# Altium PCB Gate Driver.PcbDoc (part 3 of 3)
Units mm, origin at the board's own origin, x right, y up, seen from the top; angles counter-clockwise.
Board outline 66.31 x 39.31 mm, 4 copper layers (L1 (Sig), L2 (-8V), L3 (POWER), L4 (Sig)), stack 0.603 mm thick; 125 components, 59 nets, 325 pads, 255 vias.
Unrouted connection lines stored in the file: 241.
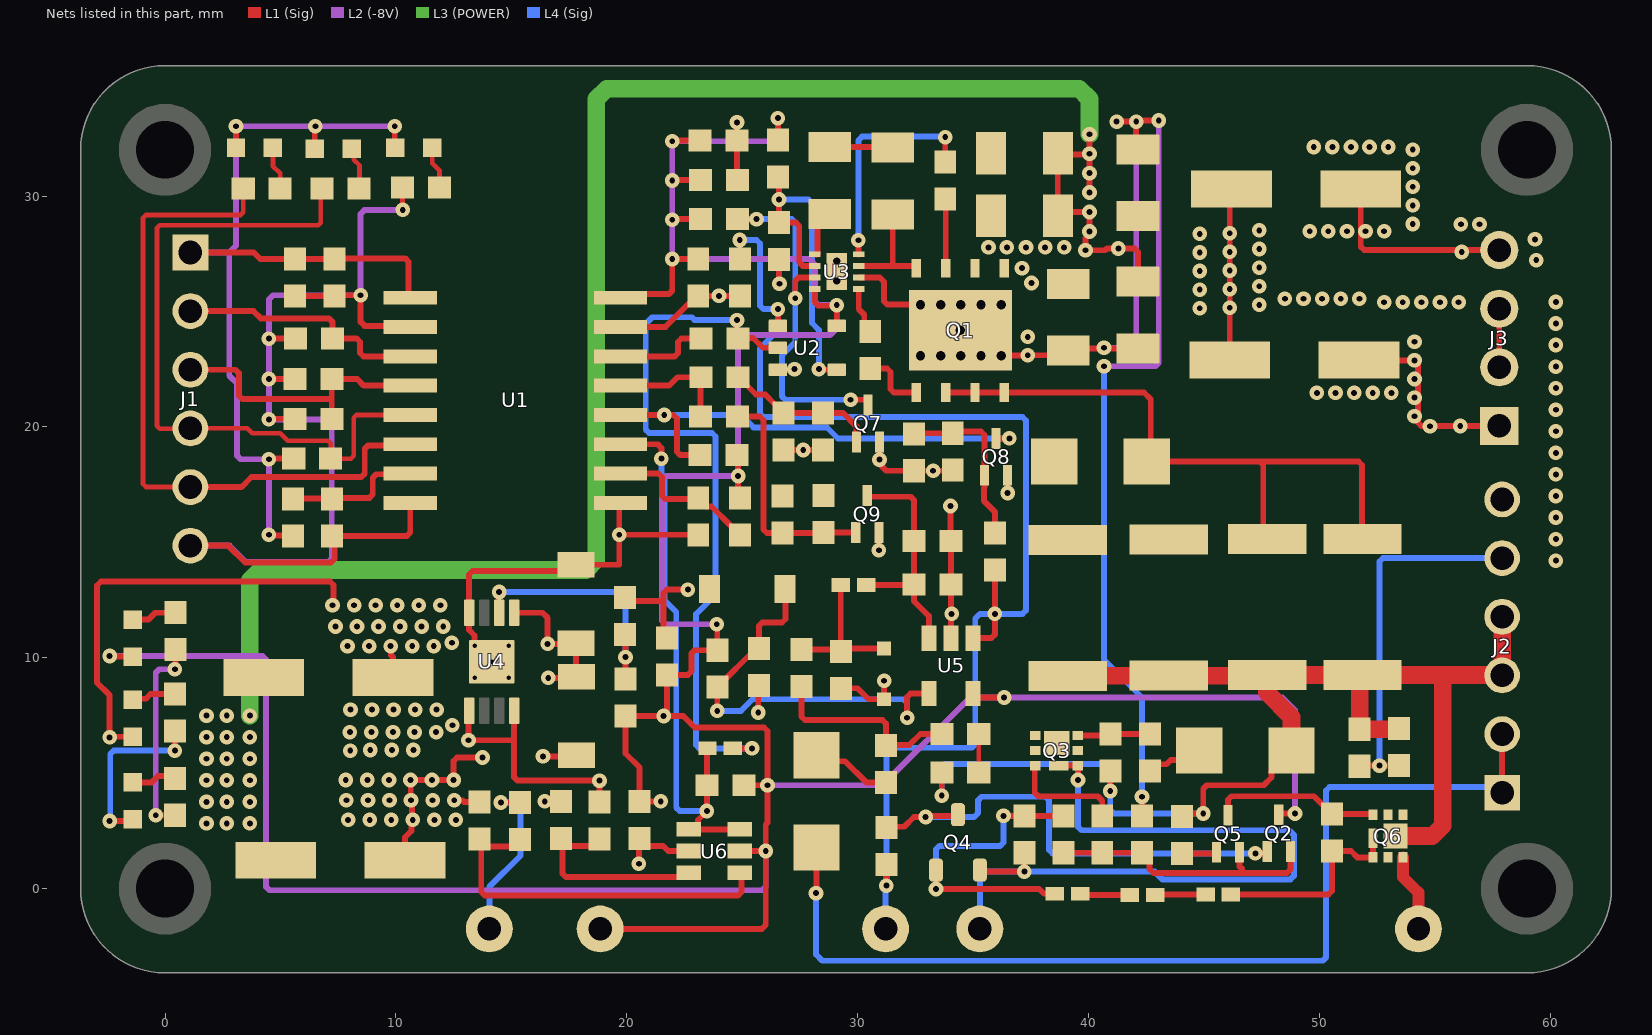
[diagram p4: the nets of this part, all layers, seen from the top]

## Via types
v1: diameter 0.635, hole 0.254, L1 (Sig) to L4 (Sig), tented both sides, 248 vias
v2: diameter 0.5, hole 0.2, L1 (Sig) to L4 (Sig), tented both sides, 5 vias
v3: diameter 0.61, hole 0.305, L1 (Sig) to L4 (Sig), 2 vias

## Nets (pads, with @x,y where several pads share a name; then routed paths per layer and width w, separated by ;. In a path a pad name is that pad's centre, name@x,y a point inside that pad or via, vN(x,y) a via of type N, cw(c..) or ccw(c..) an arc to the next point about the centre after c; other vN are vias at no path point)
0V: C2.2 C3.2 C11.2 C15.1 C16.1 C17.2 C21.1 C30.2 C31.1 D3.2 J2.5 J2.6 J3.2 J3.3 R16.1 R17.1 R40.2 TP3.1 | length 119
  L1 (Sig) w0.254: v1@-2.375,2.925 -1.5,2.925 D3.2@-1.425,3 ; v1(0.425,5.975) R17.1@0.425,6.825 ; v1(14.55,3.725) R40.2@15.375,3.725 ; v1(40.05,30.15) v1(40.05,30.992) v1@40.05,31.8 ; v1(40.05,32.675) v1(40.05,31.833) v1@40.05,31.8 ; C16.1@42.15,26.3 42.15,27.576 42.001,27.725 v1(41.3,27.725) 40.8,27.725 40.725,27.65 v1(39.875,27.65) 39.875,28.189 40.05,28.364 v1(40.05,29.308) 38.833,29.308 C3.2@38.675,29.15 C2.2@38.675,31.85 38.725,31.8 v1@40.05,31.8 ; C21.1@46.125,22.9 46.125,30.225 C17.2@46.2,30.3 ; R16.1@51.75,5.3 51.775,5.325 v1(52.613,5.325) C11.2@53.45,5.325 ; J3.2@57.8,22.58 J3.3@57.8,25.12
  L3 (POWER) w0.762: v1(3.675,7.493) 3.675,13.354 4.121,13.8 18.236,13.8 18.683,14.246 18.683,34.204 19.129,34.65 39.604,34.65 40.05,34.204 v1(40.05,32.675)
  L4 (Sig) w0.254: v1(-2.4,2.925) -2.372,2.953 -2.372,5.826 -2.223,5.975 v1(0.425,5.975) ; TP3.1@14.05,-1.75 14.05,0.075 15.4,1.425 15.4,3.576 15.251,3.725 v1(14.55,3.725) ; v1(52.613,5.325) 52.613,14.166 52.761,14.315 J2.5@57.925,14.315
  other v1: 1.8,2.823 2.675,2.823 3.675,2.823 1.8,3.757 2.675,3.757 3.675,3.757 1.8,4.691 2.675,4.691 3.675,4.691 1.8,5.625 2.675,5.625 3.675,5.625 1.8,6.559 2.675,6.559 3.675,6.559 1.8,7.493 2.675,7.493 60.25,14.205 60.25,15.139 60.25,16.073 60.25,17.007 60.25,17.941 60.25,18.875 60.25,19.809 60.25,20.743 60.25,21.677 60.25,22.611 60.25,23.545 60.25,24.479 44.825,25.138 46.125,25.162 47.4,25.288 52.813,25.4 53.619,25.4 54.425,25.4 55.231,25.4 56.038,25.4 60.25,25.412 48.513,25.55 49.319,25.55 50.125,25.55 50.931,25.55 51.737,25.55 44.825,25.944 46.125,25.969 47.4,26.094 44.825,26.75 46.125,26.775 47.4,26.9 44.825,27.556 46.125,27.581 47.4,27.706 44.825,28.362 46.125,28.387 40.05,28.467 47.4,28.512
+3V3: C4.1 C8.1 D4.2 D5.2 D6.2 J1.1 R3.2 R13.2 U1.1 | length 44.1
  L1 (Sig) w0.254: J1.1@1.1,27.555 3.845,27.555 4.125,27.275 C8.1@5.625,27.275 7.325,27.275 7.35,27.3 10.401,27.3 10.55,27.151 10.55,25.67 U1.1@10.625,25.595 ; D6.2@3.075,32.1 v1@3.075,32.875 ; v1@4.35,15.325 4.375,15.3 R13.2@5.55,15.3 ; v1@4.4,18.6 4.425,18.625 R3.2@5.575,18.625 ; D5.2@6.488,32.05 6.488,33.013 v1@6.5,33.025 ; v1@9.95,32.975 9.95,32.125 D4.2@9.975,32.1
  L2 (-8V) w0.254: J1.1@1.1,27.555 2.78,27.555 ; v1(4.5,15.325) v1(4.5,18.6) 3.274,18.6 3.125,18.749 3.125,21.875 2.78,22.22 2.78,27.555 ; v1(9.95,33.025) v1(6.512,33.025) v1(3.075,33.025) 3.075,27.85 2.78,27.555
+15V: C1.1 C2.1 C3.1 C17.1 C30.1 D2.2 J3.4 Q1.1 Q1.2 R41.2 U4.5 U4.8 | length 39.8
  L1 (Sig) w0.254: D2.2@-1.4,6.575 -2.375,6.575 v1(-2.4,6.55) -2.4,8.375 -2.946,8.921 -2.946,13.129 -2.775,13.3 7.151,13.3 7.3,13.151 7.3,12.318 v1(7.257,12.275) ; v1(9.775,10.5) 9.795,10.48 9.795,10.106 9.875,10.026 C30.1@9.875,9.15 ; U4.5@13.15,7.675 v1(13.15,6.425) 13.175,6.45 13.2,6.425 15.125,6.425 ; U4.8@15.125,7.7 15.125,6.425 ; R41.2@18.825,3.75 v1(18.825,4.675) 15.274,4.675 15.125,4.824 15.125,6.425 ; C17.1@51.8,30.3 51.8,27.809 51.949,27.66 J3.4@57.8,27.66
  other v1: 8.025,5.975 8.891,6 9.825,6 10.759,6 8.007,6.775 8.941,6.775 9.875,6.775 10.809,6.775 11.743,6.775 12.45,7.075 8.032,7.75 8.966,7.75 9.9,7.75 10.834,7.75 11.768,7.75 7.907,10.5 8.841,10.5 10.709,10.5 11.643,10.5 12.425,10.65 7.382,11.35 8.316,11.35 9.25,11.35 10.184,11.35 11.118,11.35 12.052,11.35 8.191,12.275 9.125,12.275 10.059,12.275 10.993,12.275 11.927,12.275 37.534,26.236 37.123,26.877 59.4,27.225 56.175,27.575 35.675,27.775 36.467,27.775 37.3,27.775 38.125,27.775 38.95,27.775 59.35,28.125 49.588,28.475 50.394,28.475 51.2,28.475 52.006,28.475 52.813,28.475 54.05,28.788 56.138,28.775 56.944,28.775 54.05,29.594 54.05,30.4 54.05,31.206 54.05,32.012 49.763,32.125 50.569,32.125 51.375,32.125 52.181,32.125 52.987,32.125
-3V: C5.1 C6.2 C14.1 C19.1 C20.1 C28.1 C29.1 D8.2 Q2.3 R1.2 R2.2 R14.2 R23.2 R29.2 R42.2 R48.1 TP4.1 U1.16 U2.5 U3.4 U4.1 U5.5 U6.5 | length 170
  L1 (Sig) w0.254: v1@-2.325,10.075 -2.3,10.05 D8.2@-1.4,10.05 ; U4.1@15.125,11.95 16.351,11.95 16.575,11.726 v1(16.575,10.6) 17.775,10.6 C19.1@17.8,10.625 17.8,9.2 C29.1@17.825,9.175 17.775,9.125 v1(16.6,9.125) ; TP4.1@18.85,-1.75 25.85,-1.75 26.025,-1.575 v1(26.025,1.625) ; U1.16@19.725,25.595 19.881,25.751 21.826,25.751 21.975,25.9 v1(21.975,27.275) ; v1(21.475,3.775) C28.1@20.55,3.775 20.55,5.25 19.95,5.85 R23.2@19.95,7.475 v1(21.601,7.475) ; v1@22,32.4 C14.1@23.175,32.4 ; v1@22.05,27.275 C5.1@23.1,27.275 ; v1@22.15,28.975 22.175,29 R2.2@23.2,29 ; v1@22.2,30.725 22.225,30.7 C6.2@23.2,30.7 ; v1(23.9,11.45) 23.925,11.425 R29.2@23.925,10.325 22.949,10.325 22.8,10.176 22.8,9.4 22.65,9.25 C20.1@21.75,9.25 21.75,7.624 v1(21.601,7.475) ; R42.2@24.775,18.775 24.825,18.725 v1(24.825,17.875) 24.825,17 R14.2@24.9,16.925 ; U6.5@24.892,1.625 v1(26.025,1.625) ; R48.1@25.075,4.475 v1(26.1,4.475) ; R1.2@26.55,32.425 v1(26.55,33.375) ; U3.4@28.15,25.975 28.15,25.399 28.299,25.25 29.075,25.25 v1(29.1,25.275) U2.5@29.1,24.375 ; U5.5@34.922,8.275 v1(36.35,8.275) ; Q2.3@48.25,3.2 48.3,3.25 v1(48.95,3.25) ; v1(21.601,7.475) 22.45,7.475 22.95,6.975 25.951,6.975 26.1,6.826 v1(26.1,4.475) ; v1(26.025,1.625) 26.025,2.775 26.1,2.85 v1(26.1,4.475)
  L2 (-8V) w0.254: v1(-2.4,10.075) 4.226,10.075 4.375,9.926 4.375,0.074 4.524,-0.075 25.876,-0.075 26.025,0.074 v1(26.025,1.625) ; v1(23.9,11.45) 21.674,11.45 21.525,11.599 21.525,17.675 21.725,17.875 v1(24.825,17.875) 24.825,23.55 25.25,23.975 28.801,23.975 29.1,24.274 v1(29.1,25.275) 28.3,25.275 28.15,25.425 28.15,27.025 27.9,27.275 v1(21.975,27.275) v1(21.975,28.975) v1(21.975,30.675) v1(21.975,32.375) 26.401,32.375 26.55,32.524 v1(26.55,33.375) ; v1(26.1,4.475) 31.077,4.475 34.877,8.275 v1(36.35,8.275) 48.4,8.275 48.95,7.725 v1(48.95,3.25)
-8V: C1.2 C5.2 C6.1 C7.2 C12.2 C14.2 C15.2 C16.2 C19.2 C20.2 C21.2 C22.1 C23.2 C24.2 C25.2 C26.2 C27.2 C28.2 C29.2 C31.2 D9.2 D11.2 D16.1 J3.1 Q1.9 Q3.4 Q3.7 Q4.2 Q6.4 Q6.7 Q7.2 Q8.2 Q9.2 R4.2 R18.1 R26.1 R27.1 R33.1 R37.1 R38.1 R45.1 R46.1 R47.1 R50.1 R51.1 R52.1 TP5.1 U1.9 U1.15 U2.3 U3.6 U3.9 U4.4 U4.9 U5.2 U6.2 | length 178.7
  L1 (Sig) w0.254: v1(-0.4,3.175) R18.1@0.425,3.175 ; v1(0.425,9.5) 0.45,9.525 R27.1@0.45,10.35 ; C31.2@10.4,1.225 10.4,2.225 10.675,2.5 10.675,2.916 v1(10.734,2.975) 10.696,3.013 10.696,3.788 v1(10.659,3.825) 10.646,3.838 10.646,4.688 v1(10.634,4.7) v1(11.568,4.7) v1(12.502,4.7) 12.502,5.526 12.651,5.675 v1(13.75,5.675) ; v1(12.527,3.825) 12.875,3.825 12.95,3.75 R47.1@13.625,3.75 ; v2(13.41,10.515) 13.41,10.965 13.175,11.2 U4.4@13.175,11.95 13.175,13.601 13.324,13.75 17.275,13.75 17.55,14.025 19.675,14.025 v1(19.675,15.325) ; v1(16.375,5.725) 17.775,5.725 C29.2@17.825,5.775 ; U1.9@19.725,16.705 19.675,16.655 v1(19.675,15.325) ; U1.15@19.725,24.325 21.675,24.325 23.025,25.675 C5.2@23.1,25.675 v1(24,25.675) C7.2@24.9,25.675 ; R26.1@19.925,12.6 20.074,12.451 21.6,12.451 ; v1(20.525,1.075) 20.525,1.802 20.573,1.85 21.575,1.85 21.8,1.625 U6.2@22.682,1.625 ; C20.2@21.75,10.85 21.6,11 21.6,12.451 ; v1(22.65,12.95) 21.749,12.95 21.6,12.801 21.6,12.451 ; C12.2@23.1,15.325 v1(19.675,15.325) ; v1(24.775,33.192) C14.2@24.775,32.4 24.775,30.725 C6.1@24.8,30.7 C6.1@24.8,30.845 ; v1(25.7,7.625) 25.7,8.775 C22.1@25.725,8.8 ; U2.3@26.55,22.475 27.15,22.475 27.175,22.5 v1(27.268,22.5) ; R4.2@26.6,27.25 26.6,26.22 v1(26.62,26.2) ; C25.2@26.8,19 v1(27.65,19) R50.1@28.5,19 ; R38.1@29.275,8.675 30,8.675 30.475,8.2 D11.2@31.15,8.2 v1(31.15,9) ; U3.6@30.05,26.475 30.963,26.475 31.15,26.288 31.15,25.444 31.299,25.295 Q1.9@32.725,25.295 ; v1(30.925,14.657) 30.925,14.825 Q9.2@30.925,15.425 ; Q7.2@30.95,19.35 v1(30.95,18.582) 31.023,18.51 31.023,18.322 31.245,18.1 v1(33.275,18.1) 34.1,18.1 R51.1@34.125,18.125 ; v1(34.025,16.575) 34.025,15.075 R37.1@34.05,15.05 C23.2@34.05,13.175 34.05,11.925 v1(34.075,11.9) 34.05,11.875 U5.2@34.05,10.85 ; Q4.2@35.3,0.8 35.367,0.733 v1(37.225,0.733) C24.2@37.225,1.55 ; Q1.9@36.225,23.075 36.237,23.087 37.362,23.087 v1(37.375,23.1) 38.925,23.1 39.225,23.4 C16.2@42.15,23.4 ; v1(36.5,17.132) Q8.2@36.5,17.9 ; Q3.7@38.721,5.325 Q3.4@39.548,5.325 39.548,4.703 v1(39.55,4.7) ; v1(41.225,33.225) v1(42.075,33.225) ; C15.2@42.15,32.025 42.075,32.1 v1(42.075,33.225) ; R33.1@42.325,3.15 v1(42.325,3.975) ; v1(43.05,33.275) 42.125,33.275 v1(42.075,33.225) ; D16.1@46.175,-0.25 50.401,-0.25 50.55,-0.101 R45.1@50.55,1.625 51.375,1.625 51.647,1.352 Q6.4@52.325,1.352 Q6.7@52.325,2.179 ; C21.2@51.725,22.9 51.75,22.875 54.126,22.875 54.275,22.726 54.275,20.189 54.424,20.04 J3.1@57.8,20.04
  L2 (-8V) w0.254: v1(-0.4,3.175) -0.4,9.351 -0.251,9.5 v1(0.425,9.5) ; v1(40.675,22.625) 42.901,22.625 43.05,22.774 v1(43.05,33.275) ; v1(40.675,23.425) 41.926,23.425 42.075,23.574 v1(42.075,33.225)
  L4 (Sig) w0.254: TP5.1@35.3,-1.75 35.3,0.584 35.449,0.733 v1(37.225,0.733) 42.873,0.733 43.205,0.4 48.75,0.4 48.9,0.55 48.9,2.325 48.7,2.525 39.699,2.525 39.55,2.674 v1(39.55,4.7) ; v1(40.675,22.625) 40.675,9.925 42.325,8.275 v1(42.325,3.975)
  other v1: 7.932,2.975 8.866,2.975 9.8,2.975 11.668,2.975 12.602,2.975 16.45,3.775 7.857,3.825 8.791,3.825 9.725,3.825 11.593,3.825 7.832,4.7 8.766,4.7 9.7,4.7 54.8,20.025 56.112,20.04 54.125,20.463 54.125,21.269 49.9,21.475 50.706,21.475 51.513,21.475 52.319,21.475 53.125,21.475 54.125,22.075 54.125,22.881 54.125,23.687 37.375,23.9
  other v2: 13.41,9.135 14.89,9.135 14.15,9.825 14.89,10.515
  other v3: 29.1,26.325 29.1,27.182
ABP: C23.1 D12.1 Q9.3 R37.2 U5.3 | length 10.4
  L1 (Sig) w0.254: D12.1@30.375,13.15 32.425,13.15 C23.1@32.45,13.175 ; Q9.3@30.425,17.025 30.475,16.975 32.301,16.975 32.45,16.826 R37.2@32.45,15.05 C23.1@32.45,13.175 ; U5.3@33.1,10.85 33.1,11.8 32.45,12.45 C23.1@32.45,13.175
AGND: C4.2 C8.2 C10.2 C13.2 J1.6 R11.1 R12.1 R19.1 U1.2 U1.8 | length 52.8
  L1 (Sig) w0.203: R19.1@10.287,30.375 10.287,29.538 v1@10.3,29.525
  L1 (Sig) w0.254: J1.6@1.1,14.855 2.745,14.855 3.475,14.125 7.201,14.125 7.35,14.274 7.35,15.15 C13.2@7.225,15.275 10.476,15.275 10.625,15.424 U1.8@10.625,16.705 ; v1@4.35,23.825 v1(4.5,23.825) R12.1@5.65,23.825 ; v1@4.475,20.325 4.5,20.35 C10.2@5.625,20.35 ; v1(4.5,22.075) R11.1@5.625,22.075 ; C8.2@5.625,25.675 7.325,25.675 7.35,25.7 v1(8.475,25.7) 8.475,24.549 8.649,24.375 10.575,24.375 U1.2@10.625,24.325
  L2 (-8V) w0.254: J1.6@1.1,14.855 2.795,14.855 3.5,14.15 7.076,14.15 7.225,14.299 7.225,20.05 6.95,20.325 v1(4.5,20.325) v1(4.5,22.075) v1(4.5,23.825) 4.5,25.525 4.675,25.7 v1(8.475,25.7) 8.475,29.225 8.65,29.4 v1(10.3,29.4)
BST_A: R5.2 U3.1 | length 2.1
  L1 (Sig) w0.254: U3.1@28.15,27.475 28.271,27.475 28.273,27.477 28.273,28.702 28.796,29.225 R5.2@28.8,29.225
COLLECTOR: D10.1 J2.1 J2.2 | length 44.5
  L1 (Sig) w0.254: v1(28.2,-0.2) 28.225,-0.175 D10.1@28.225,1.775 ; J2.1@57.925,4.155 J2.2@57.925,6.695
  L4 (Sig) w0.254: v1(28.2,-0.2) 28.2,-2.85 28.475,-3.125 50.151,-3.125 50.3,-2.976 50.3,4.251 50.449,4.4 57.68,4.4 J2.1@57.925,4.155
DESAT_DETECT: C7.1 R28.1 R43.2 TP2.1 U2.1 U5.1 | length 55
  L1 (Sig) w0.254: C7.1@24.9,27.275 v1(24.9,28.093) ; U2.1@26.55,24.375 v1(26.55,25.1) ; v1(31.25,0.125) R28.1@31.25,1.05 ; U5.1@35,10.85 35.801,10.85 35.95,10.999 v1(35.95,11.9) R43.2@35.95,13.8
  L4 (Sig) w0.254: v1(24.9,28.093) 25.626,28.093 25.775,27.944 25.775,25.249 25.924,25.1 v1(26.55,25.1) 26.55,24.175 25.775,23.4 25.775,20.574 25.924,20.425 37.142,20.425 37.291,20.276 37.291,12.049 37.142,11.9 v1(35.95,11.9) 35.303,11.9 35.1,11.697 35.1,6.25 34.95,6.1 31.399,6.1 31.25,5.951 v1(31.25,0.125) 31.213,0.088 TP2.1@31.213,-1.837
ENABLE: C13.1 R13.1 U1.7 | length 5.3
  L1 (Sig) w0.254: R13.1@5.55,16.9 7.2,16.9 C13.1@7.225,16.875 7.275,16.925 8.851,16.925 9,17.074 9,17.801 9.149,17.95 9.925,17.95 U1.7@9.95,17.975
FAULT: J1.4 R3.1 R20.1 U1.5 | length 31
  L1 (Sig) w0.203: R20.1@6.8,30.325 6.75,30.275 6.75,28.85 6.631,28.731 -0.231,28.731 -0.35,28.612 -0.35,20.044 -0.231,19.925 1.09,19.925 J1.4@1.1,19.935 3.565,19.935 3.775,19.725 4.988,19.725 5.313,19.4 7.056,19.4 7.175,19.281 R3.1@7.175,18.625 8.056,18.625 8.175,18.744 8.175,20.396 8.294,20.515 U1.5@10.625,20.515
FAULT_ISO: Q8.3 R42.1 U1.12 | length 21
  L1 (Sig) w0.254: U1.12@19.725,20.515 v1(21.625,20.515) 22.026,20.515 22.175,20.366 22.175,18.924 22.324,18.775 R42.1@23.175,18.775 ; Q8.3@36,19.5 v1(36.575,19.5)
  L4 (Sig) w0.254: v1(21.625,20.515) 24.96,20.515 25.5,19.975 28.675,19.975 29.15,19.5 v1(36.575,19.5)
GATE: C11.1 D7.1 J2.3 J2.4 Q6.1 Q6.2 Q6.5 Q6.6 Q6.8 R8.1 R9.1 R10.2 R15.2 R16.2 R24.2 R35.1 R39.1 TP1.1 | length 64.6
  L1 (Sig) w0.254: v1(33.65,4.025) R35.1@33.65,5.025 ; v1(40.95,4.225) R24.2@40.95,5.1 ; R39.1@44.05,3.125 44.175,3.25 v1(44.975,3.25) 44.975,4.326 45.124,4.475 47.6,4.475 47.935,4.81 47.935,5.11 D7.1@48.8,5.975
  L1 (Sig) w0.508: Q6.6@53.625,1.352 53.625,0.5 54.3,-0.175 TP1.1@54.3,-1.837
  L1 (Sig) w0.762: R8.1@39.125,9.225 R9.1@43.475,9.225 47.725,9.225 47.725,8.5 48.8,7.425 D7.1@48.8,5.975 ; R15.2@47.75,9.25 R10.2@51.875,9.25 ; Q6.8@53.3,2.275 54.904,2.275 55.35,2.721 55.35,9.2 55.3,9.25 ; C11.1@53.45,6.925 53.425,6.9 R16.2@51.75,6.9 51.75,9.125 R10.2@51.875,9.25 ; J2.4@57.925,11.775 J2.3@57.925,9.235 57.91,9.25 55.3,9.25 ; R10.2@51.875,9.25 55.3,9.25
  L4 (Sig) w0.254: v1(33.65,4.025) 33.65,5.251 33.799,5.4 40.801,5.4 40.95,5.251 40.95,4.052 40.95,3.399 41.099,3.25 v1(44.975,3.25)
NetC9_1: C9.1 R5.1 | length 2.7
  L1 (Sig) w0.254: R5.1@28.8,32.125 31.5,32.125 C9.1@31.525,32.1
NetC12_1: C12.1 R14.1 U1.10 | length 7.2
  L1 (Sig) w0.254: U1.10@19.725,17.975 21.376,17.975 21.525,17.826 21.525,17.024 21.674,16.875 C12.1@23.1,16.875 ; C12.1@23.1,16.925 23.1,16.9 23.448,16.552 23.673,16.552 24.527,15.698 24.552,15.698 24.9,15.35 R14.1@24.9,15.325 ; R14.1@24.8,15.225 24.9,15.225 R14.1@25.255,15.225
NetC22_2: C22.2 D9.1 R29.1 U5.4 | length 18.1
  L1 (Sig) w0.254: v1(23.925,7.699) R29.1@23.925,8.725 25.6,10.4 C22.2@25.725,10.4 25.725,11.376 25.874,11.525 26.726,11.525 26.875,11.674 26.875,12.962 D9.1@26.862,12.975 ; v1(32.15,7.4) 32.15,8.301 32.299,8.45 U5.4@33.1,8.45
  L4 (Sig) w0.254: v1(23.925,7.699) 24.949,7.699 25.45,8.2 32.001,8.2 32.15,8.051 v1(32.15,7.4)
NetC24_1: C24.1 D14.2 Q4.1 R31.1 | length 14.6
  L1 (Sig) w0.254: Q4.1@33.4,0.8 v1(33.4,-0.018) 37.866,-0.018 38.074,-0.225 D14.2@38.55,-0.225 ; v1(36.325,3.15) C24.1@37.225,3.15 R31.1@38.925,3.15
  L4 (Sig) w0.254: v1(33.4,-0.018) 33.4,1.701 33.549,1.85 36.176,1.85 36.325,1.999 v1(36.325,3.15)
NetC25_1: C25.1 Q7.1 R44.2 R50.2 | length 6.7
  L1 (Sig) w0.254: R44.2@24.825,22.15 24.85,22.15 25.6,21.4 26,21.4 26.427,20.973 26.452,20.973 26.8,20.625 C25.1@26.8,20.6 R50.2@28.5,20.6 29.376,20.6 29.95,20.026 Q7.1@29.95,19.35
NetC26_1: C26.1 Q8.1 R43.1 R51.2 | length 7.6
  L1 (Sig) w0.254: C26.1@32.45,19.7 32.475,19.725 R51.2@34.125,19.725 34.2,19.8 35.351,19.8 35.5,19.651 Q8.1@35.5,17.9 35.5,17.374 35.471,17.345 35.471,16.804 35.95,16.325 R43.1@35.95,15.4
NetC27_1: C27.1 Q9.1 R49.2 R52.2 | length 10
  L1 (Sig) w0.254: R49.2@24.8,20.45 25.776,20.45 25.925,20.301 25.925,15.549 26.074,15.4 R52.2@26.75,15.4 28.5,15.4 C27.1@28.525,15.425 Q9.1@29.925,15.425
NetD1_2: D1.2 R8.2 R9.2
NetD2_1: D2.1 R17.2 | length 1.9
  L1 (Sig) w0.254: D2.1@-1.35,8.225 -0.825,8.225 -0.625,8.425 R17.2@0.425,8.425
NetD3_1: D3.1 R18.2 | length 2
  L1 (Sig) w0.254: D3.1@-1.4,4.6 -0.575,4.6 -0.3,4.875 0.325,4.875 R18.2@0.425,4.775
NetD4_1: D4.1 R19.2 | length 1.9
  L1 (Sig) w0.203: D4.1@11.575,32.1 11.575,31.425 11.887,31.113 R19.2@11.887,30.375
NetD5_1: D5.1 R20.2 | length 1.9
  L1 (Sig) w0.203: D5.1@8.088,32.05 8.175,31.963 8.175,31.574 8.425,31.324 8.425,30.35 R20.2@8.4,30.325
NetD6_1: D6.1 R21.2 | length 1.9
  L1 (Sig) w0.203: D6.1@4.675,32.1 4.675,31.3 4.987,30.988 R21.2@4.987,30.325
NetD7_2: D7.2 R25.2 | length 2.5
  L1 (Sig) w0.254: R25.2@42.675,5.1 42.957,5.382 43.382,5.382 43.568,5.568 44.393,5.568 D7.2@44.8,5.975
NetD8_1: D8.1 R27.2 | length 2
  L1 (Sig) w0.254: D8.1@-1.4,11.65 -0.725,11.65 -0.425,11.95 R27.2@0.45,11.95
NetD10_2: D10.2 R32.1 | length 3.5
  L1 (Sig) w0.254: D10.2@28.225,5.775 28.482,5.518 29.457,5.518 30.375,4.6 R32.1@31.225,4.6
NetD11_1: D11.1 D12.2 R34.2 R38.2 | length 6.5
  L1 (Sig) w0.254: R34.2@27.575,10.35 29.2,10.35 R38.2@29.275,10.275 ; D12.2@29.275,13.15 R38.2@29.275,10.275 ; D11.1@31.15,10.4 29.4,10.4 R38.2@29.275,10.275
NetD14_1: D14.1 D15.2 | length 2.2
  L1 (Sig) w0.254: D14.1@39.65,-0.225 39.7,-0.275 D15.2@41.8,-0.275
NetD15_1: D15.1 D16.2 | length 2.2
  L1 (Sig) w0.254: D15.1@42.9,-0.275 42.925,-0.25 D16.2@45.075,-0.25
NetQ1_3: Q1.3 R7.2 | length 3
  L1 (Sig) w0.254: R7.2@33.8,29.875 33.819,29.856 Q1.3@33.819,26.877
NetQ1_5: Q1.5 R22.2 | length 2.9
  L1 (Sig) w0.254: R22.2@30.55,22.525 31.276,22.525 31.425,22.376 31.425,21.641 31.574,21.492 Q1.5@32.549,21.492
NetQ2_1: Q2.1 Q4.3 R28.2 | length 21
  L1 (Sig) w0.254: R28.2@31.25,2.675 32.025,2.675 32.45,3.1 v1(32.95,3.1) ; v1@33,3.15 Q4.3@34.338,3.15 ; v1(47.233,1.525) 47.675,1.525 Q2.1@47.75,1.6
  L4 (Sig) w0.254: v1(32.95,3.1) 35.051,3.1 35.225,3.274 35.225,3.826 35.374,3.975 38.151,3.975 38.3,3.826 38.3,1.674 38.449,1.525 v1(47.233,1.525)
NetQ2_2: Q2.2 Q5.2 R30.1 R31.2 R33.2 | length 12.2
  L1 (Sig) w0.254: R31.2@38.925,1.55 R30.1@40.6,1.55 R33.2@42.325,1.55 42.64,1.235 42.64,0.86 42.825,0.675 46.649,0.675 ; Q5.2@46.55,1.575 46.55,0.961 46.649,0.862 46.649,0.675 ; Q2.2@48.75,1.6 48.75,0.824 48.601,0.675 46.649,0.675
NetQ3_1: Q3.1 Q3.2 Q3.5 Q3.6 Q3.8 R24.1 R25.1 | length 3.2
  L1 (Sig) w0.254: Q3.6@39.548,6.625 40.875,6.625 R24.1@40.95,6.7 R25.1@42.675,6.7
NetQ3_3: Q3.3 R30.2 | length 4.9
  L1 (Sig) w0.254: Q3.3@37.703,5.325 37.675,5.297 37.675,4.148 37.824,3.999 40.404,3.999 40.6,3.803 R30.2@40.6,3.15
NetQ5_1: Q5.1 R39.2 | length 1.5
  L1 (Sig) w0.254: R39.2@44.05,1.525 45.5,1.525 Q5.1@45.55,1.575
NetQ5_3: Q5.3 Q6.3 R45.2 | length 7.4
  L1 (Sig) w0.254: Q5.3@46.05,3.175 46.05,3.847 46.203,4 49.775,4 50.177,3.598 50.202,3.598 50.55,3.25 R45.2@50.55,3.225 52.298,3.225 Q6.3@52.325,3.197
NetR7_1: R7.1 U3.8 | length 9.8
  L1 (Sig) w0.254: v1(30.038,28.088) 30.038,27.477 30.04,27.475 U3.8@30.05,27.475 ; R7.1@33.8,31.475 v1(33.8,32.55)
  L4 (Sig) w0.254: v1(30.038,28.088) 30.038,32.412 30.2,32.575 v1@33.75,32.575
NetR22_1: R22.1 U3.5 | length 2.1
  L1 (Sig) w0.254: U3.5@30.05,25.975 30.05,25.1 30.293,24.857 30.293,24.382 R22.1@30.55,24.125
NetR23_1: R23.1 R26.2 U4.2 | length 11
  L1 (Sig) w0.254: U4.2@14.475,11.95 v1(14.475,12.85) ; R26.2@19.925,11 19.95,10.975 v1(19.95,10.025) R23.1@19.95,9.075
  L4 (Sig) w0.254: v1(14.475,12.85) 19.776,12.85 19.95,12.676 v1(19.95,10.025)
NetR32_2: R32.2 R34.1 R36.2 | length 8.6
  L1 (Sig) w0.254: R34.1@27.575,8.75 27.575,7.449 27.724,7.3 31.076,7.3 31.225,7.151 R32.2@31.225,6.225 ; R32.2@31.225,6.2 R32.2@31.225,6.225 ; R36.2@33.65,6.7 32.725,6.7 32.25,6.225 R32.2@31.225,6.225
NetR35_2: R35.2 R36.1 | length 1.7
  L1 (Sig) w0.203: R35.2@35.25,5.025 R36.1@35.25,6.7
NetR40_1: R40.1 R47.2 U6.4 | length 16
  L1 (Sig) w0.254: R40.1@15.45,1.8 15.425,1.825 13.7,1.825 13.7,-0.151 13.849,-0.3 24.826,-0.3 24.975,-0.151 24.975,0.602 U6.4@24.892,0.685
NetR41_1: R41.1 R46.2 U6.3 | length 8.5
  L1 (Sig) w0.254: R41.1@18.9,1.825 18.875,1.85 17.225,1.85 17.225,0.643 17.374,0.495 22.491,0.495 U6.3@22.682,0.685
PWM: J1.2 R12.2 U1.3 | length 11
  L1 (Sig) w0.254: J1.2@1.1,25.015 3.835,25.015 4.15,24.7 7.101,24.7 7.25,24.551 R12.2@7.25,23.825 8.301,23.825 8.45,23.676 8.45,23.204 8.599,23.055 U1.3@10.625,23.055
PWM_A: R6.2 U1.14 | length 4.1
  L1 (Sig) w0.254: U1.14@19.725,23.055 22.076,23.055 22.225,23.204 22.225,23.678 22.374,23.827 R6.2@23.225,23.827
PWM_BUFF: R1.1 R4.1 U2.4 U3.2 | length 14.7
  L1 (Sig) w0.254: R1.1@26.55,30.825 26.6,30.775 v1(26.6,29.85) R4.1@26.6,28.85 27.326,28.85 27.475,28.701 27.475,27.126 27.624,26.977 U3.2@28.027,26.977 ; v1(28.325,22.5) 28.35,22.475 U2.4@29.1,22.475
  L4 (Sig) w0.254: v1(26.6,29.85) 27.876,29.85 28.025,29.701 28.025,24.5 28.325,24.2 v1(28.325,22.5)
PWM_ISO: D13.2 R6.1 U2.2 | length 31.6
  L1 (Sig) w0.254: D13.2@24.6,6.075 v1(25.425,6.075) ; v1(24.775,24.625) 24.775,23.877 R6.1@24.825,23.827 24.848,23.85 25.475,23.85 25.9,23.425 U2.2@26.55,23.425
  L4 (Sig) w0.254: v1(24.775,24.625) 22.951,24.625 22.826,24.75 21.105,24.75 20.825,24.47 20.825,19.879 20.974,19.73 23.696,19.73 23.845,19.582 23.845,12.732 23,11.887 23,6.224 23.149,6.075 v1(25.425,6.075)
RESET: C10.1 J1.3 R11.2 U1.4 | length 12.5
  L1 (Sig) w0.254: J1.3@1.1,22.475 3.051,22.475 3.2,22.326 3.2,21.361 3.349,21.213 7.225,21.213 ; C10.1@7.225,20.35 7.225,21.213 ; U1.4@10.625,21.785 8.615,21.785 8.325,22.075 R11.2@7.225,22.075 7.225,21.213
RESET_ISO: R44.1 R49.1 U1.13 | length 5.4
  L1 (Sig) w0.254: U1.13@19.725,21.785 21.835,21.785 22.2,22.15 R44.1@23.225,22.15 23.2,22.125 R49.1@23.2,20.45
SKIP: Q7.3 R2.1 U3.3 | length 15.8
  L1 (Sig) w0.254: R2.1@24.8,29 v1(25.625,29) ; v1(27.3,25.575) 27.3,26.324 27.449,26.473 U3.3@28.027,26.473 ; v1(29.7,21.175) 30.377,21.175 30.45,21.102 Q7.3@30.45,20.95
  L4 (Sig) w0.254: v1(25.625,29) 27.151,29 27.3,28.851 v1(27.3,25.575) 27.3,23.675 26.721,23.096 26.721,21.333 26.879,21.175 v1(29.7,21.175)
SW_A: D1.1 Q1.6 Q1.7 Q1.8 R10.1 R15.1 | length 27.6
  L1 (Sig) w0.254: Q1.6@33.819,21.492 Q1.7@35.089,21.492 Q1.8@36.359,21.492 42.408,21.492 42.7,21.2 42.7,18.675 D1.1@42.525,18.5 47.426,18.5 ; R15.1@47.675,15.275 47.575,15.375 47.575,18.351 47.426,18.5 ; R10.1@51.8,15.275 51.85,15.325 51.85,18.351 51.701,18.5 47.426,18.5
SW_NODE: C9.2 Q1.4 U3.7 | length 4.7
  L1 (Sig) w0.254: U3.7@30.173,26.973 31.374,26.973 31.376,26.975 31.525,26.975 ; C9.2@31.525,29.2 31.525,26.975 ; Q1.4@32.549,26.877 32.549,26.897 32.471,26.975 31.525,26.975
UVLO: J1.5 R21.1 U1.6 | length 30
  L1 (Sig) w0.203: J1.5@1.1,17.395 -0.82,17.395 -0.95,17.525 -0.95,29.056 -0.831,29.175 3.268,29.175 3.387,29.294 R21.1@3.387,30.325
  L1 (Sig) w0.254: J1.5@1.1,17.395 3.32,17.395 3.75,17.825 8.5,17.825 8.65,17.975 8.65,19.051 8.799,19.2 10.58,19.2 U1.6@10.625,19.245
UVLO_ISO: D13.1 R48.2 U1.11 U6.1 U6.6 | length 25.3
  L1 (Sig) w0.254: U1.11@19.725,19.245 21.343,19.245 21.5,19.088 v1(21.5,18.625) ; D13.1@23.5,6.075 23.475,6.05 R48.2@23.475,4.475 v1(23.475,3.358) 23.088,2.971 23.088,2.755 22.898,2.565 U6.1@22.682,2.565 U6.6@24.892,2.565
  L4 (Sig) w0.254: v1(21.5,18.625) 21.5,17.924 21.649,17.775 21.649,12.476 22.147,11.978 22.147,3.507 22.296,3.358 v1(23.475,3.358)
pads on no net: MH1.1 MH2.1 MH3.1 MH4.1 U4.3 U4.6 U4.7

## Polygon pours and split planes (outlines as drawn)
+15V on L1 (Sig) "+15V_L01_P045" (solid, remove dead copper, pour order 45): 17.075,13.913 17.6,13.388 17.6,5.225 17.7,5.125 19.45,5.125 19.45,2.75 5.975,2.75 5.975,13.913
AGND on L1 (Sig) "AGND_L01_P040" (solid, remove dead copper, pour order 40): -3.425,13.75 13.324,13.75 13.65,14.076 13.65,35.4 -0.885,35.4 ccw(c-0.885,32.86) -3.425,32.86
AGND on L1 (Sig) "AGND_L01_P038" (solid, remove dead copper, pour order 38): -3.313,13.862 -3.35,13.9 -3.35,32.835 cw(c-0.81,32.835) -0.81,35.375 12.725,35.375 12.95,35.15 12.95,14
-8V on L1 (Sig) "-8V_L01_P037" (solid, remove dead copper, pour order 37): -3.475,13.7 -3.15,14.025 17.8,14.025 17.8,35.275 17.9,35.6 59.985,35.6 cw(c59.985,33.06) 62.525,33.06 62.525,32.375 62.6,32.3 62.6,-1.01 cw(c60.06,-1.01) 60.06,-3.55 -1.085,-3.55 cw(c-1.085,-1.01) -3.625,-1.01 -3.625,-0.075 ccw(c-3.625,0.075) -3.475,0.075
0V on L1 (Sig) "0V_L01_P034" (solid, remove dead copper, pour order 34): 16.025,-0.425 16.075,-0.45 16.075,-3.484 2.912,-3.484 cw(c2.912,-2.775) 2.204,-2.772 2.217,0.042 ccw(c-0.315,-0.152) -0.06,2.375 -2.75,2.375 -2.75,10.681 6.6,10.725 6.6,5.825 7.1,5.325 7.1,-0.1 7.425,-0.425
SW_NODE on L1 (Sig) "SW_NODE_L01_P007" (solid, remove dead copper, pour order 7): 29.625,27.25 30.375,27.25 30.375,29.9 30.425,29.95 33,29.95 33.125,29.825 33.125,26.35 31.9,26.35 31.575,26.675 29.622,26.675
-8V on L1 (Sig) "-8V_L01_P005" (solid, remove dead copper, pour order 5): 18.1,24.925 18.1,23.758 27.4,23.758 27.4,27.875 27.35,27.925 25.75,27.925 25.75,26.55 25.45,26.25 22.9,26.25 21.575,24.925
+15V on L1 (Sig) "+15V_L01_P000" (solid, remove dead copper, pour order 0): 34.425,34.325 37.275,34.325 37.275,28.2 40.2,28.2 40.2,25.45 34.425,25.45
GATE on L1 (Sig) "GATE_L01_P016" (solid, remove dead copper, pour order 16): 46.4,7.925 46.8,7.525 46.8,4.475 50.275,4.475 50.275,6.1 54.275,6.1 54.375,6 54.375,4.275 54.175,4.075 52.75,4.075 52.75,0.925 56.175,0.925 56.175,7.45 56.625,7.925 61.05,7.925 61.05,12.9 53.775,12.9 53.775,11.275 37.15,11.275 37.15,7.925
NetQ3_1 on L1 (Sig) "NETQ3_1_L01_P017" (solid, remove dead copper, pour order 17): 37.225,5.675 37.25,5.7 40.125,5.7 40.125,6.075 43.25,6.075 43.325,6.15 43.325,7.55 37.225,7.55
-8V on L1 (Sig) "-8V_L01_P002" (solid, remove dead copper, pour order 2): 31.425,22.775 31.6,22.6 43.525,22.6 43.525,24.35 36.75,24.35 36.75,26.125 31.375,26.125 31.375,26.675 29.597,26.675 29.597,27.6 28.65,27.6 28.6,27.55 28.609,25.7 29.543,25.7 29.597,25.647 29.597,26.303 30.503,26.303 30.475,26.275 30.475,24.954 31.196,24.954 31.425,24.725
+15V on L1 (Sig) "+15V_L01_P015" (solid, remove dead copper, pour order 15): 49.275,26.975 49.275,33.6 49.6,33.925 55.225,33.925 55.575,33.575 55.575,29.425 55.875,29.125 61.6,29.125 61.6,26.725 49.468,26.725
SW_A on L1 (Sig) "SW_A_L01_P012" (solid, remove dead copper, pour order 12): 43.687,22.575 46.037,20.225 52.925,20.225 52.925,20.2 53.7,19.425 53.7,14.125 45.55,14.125 45.55,16.7 40.975,16.7 40.625,17.05 40.625,20.225 33.425,20.225 33.425,22.575
-8V on L1 (Sig) "-8V_L01_P014" (solid, remove dead copper, pour order 14): 49.25,24.921 55.325,24.921 55.325,21.225 59.425,21.225 59.625,21.025 59.625,18.425 59.575,18.475 53.241,18.475 53.241,20.775 49.25,20.775
NetD1_2 on L1 (Sig) "NETD1_2_L01_P013" (solid, remove dead copper, pour order 13): 45.325,14.1 45.325,16.55 45.2,16.675 40.225,16.675 40.1,16.8 40.1,20.05 39.925,20.225 37.025,20.225 37.025,14.125 37.05,14.1
-8V on L1 (Sig) "-8V_L01_P011" (solid, remove dead copper, pour order 11): 26.15,16.4 26.2,16.45 26.2,19.6 29.1,19.6 29.125,19.575 29.125,16.425
-3V on L1 (Sig) "-3V_L01_P004" (solid, remove dead copper, pour order 4): 21.325,25.2 21.825,25.7 22.4,26.275 23.825,26.275 23.875,26.325 23.875,33.125 21.325,33.125 21.325,26.55 20.925,26.15 18.05,26.15 18.05,25.2
NetC9_1 on L1 (Sig) "NETC9_1_L01_P008" (solid, remove dead copper, pour order 8): 27.6,31.3 27.6,33.125 32.875,33.125 32.875,31.3
BST_A on L1 (Sig) "BST_A_L01_P006" (solid, remove dead copper, pour order 6): 27.75,27.275 27.75,30.05 30,30.05 30.025,30.025 30.025,28.1 28.6,28.1 28.6,27.275
-8V on L1 (Sig) "-8V_L01_P003" (solid, remove dead copper, pour order 3): 40.475,31.113 40.475,33.537 43.625,33.537 43.625,31.113
0V on L1 (Sig) "0V_L01_P001" (solid, remove dead copper, pour order 1): 61.725,26.05 61.725,13.4 61.5,13.175 55.325,13.175 55.325,18 55.6,18.275 58.8,18.275 59.2,18.675 59.2,21.525 55.7,21.525 55.7,23.9 55.2,24.4 48,24.4 48,21.925 44.1,21.925 44.1,25.4 39.475,25.4 39.475,27.891 39.166,28.2 37.55,28.2 37.55,33.65 40.575,33.65 40.575,29.9 43.675,29.9 43.675,33.65 48,33.65 48,26.05
+3V3 on L3 (POWER) "+3V3_L03_P042" (solid, remove dead copper, pour order 42): -3.425,13.75 13.324,13.75 13.65,14.076 13.65,35.4 -0.885,35.4 ccw(c-0.885,32.86) -3.425,32.86
0V on L3 (POWER) "0V_L03_P010" (solid, remove dead copper, pour order 10): 38.296,28.066 36.738,29.625 24.65,29.625 24.65,-3.5 -0.822,-3.5 cw(c-0.823,-0.96) -3.362,-0.96 -3.362,15.25 15.563,15.25 16.413,16.1 16.413,35.95 48.688,35.95 48.688,26.55 48.838,26.4 61.438,26.4 61.588,26.25 61.588,13.7 61.238,13.35 56.05,13.35 56.05,21.45 38.296,21.45
-3V on L2 (-8V) "-3V_L02_P036" (solid, remove dead copper, pour order 36): 28.325,-2.8 28.325,1.725 27.925,2.125 28.725,2.925 31.4,2.925 35.55,7.075 47.625,7.075 48.025,6.675 48.025,2 49.9,2 50.375,2.475 50.375,10.675 33.95,10.675 31.35,13.275 31.35,34.325 20.325,34.325 20.2,34.45 19.4,33.65 19.4,14.1 18.975,13.675 16.325,13.675 15.325,12.675 15.325,-2.8
+15V on L2 (-8V) "+15V_L02_P033" (solid, remove dead copper, pour order 33): 6.225,14.175 6.05,14.35 6.05,34.975 59.36,34.975 cw(c59.36,32.435) 61.9,32.435 61.9,26.625 48.6,26.625 48.175,27.05 48.175,29.425 41.05,29.425 40.45,28.825 40.45,25.05 34.72,25.05 34.2,25.57 34.2,31.725 14.575,31.725 14.1,31.25 14.1,4.677 6.05,4.648 6.05,14.175
-8V on L4 (Sig) "-8V_L04_P044" (solid, remove dead copper, pour order 44): 16.375,35.325 58.9,35.325 58.975,35.4 60.06,35.4 cw(c60.06,32.86) 62.6,32.86 62.6,-0.15 62.55,-0.15 62.55,-1.185 cw(c60.01,-1.185) 60.01,-3.725 59.05,-3.725 -0.075,-3.85 -1.11,-3.85 cw(c-1.11,-1.31) -3.65,-1.31 -3.65,12.8 16.25,12.8 16.375,12.925
AGND on L4 (Sig) "AGND_L04_P041" (solid, remove dead copper, pour order 41): -3.425,13.75 13.324,13.75 13.65,14.076 13.65,35.4 -0.885,35.4 ccw(c-0.885,32.86) -3.425,32.86
+3V3 on L4 (Sig) "+3V3_L04_P039" (solid, remove dead copper, pour order 39): -3.313,13.862 -3.35,13.9 -3.35,32.835 cw(c-0.81,32.835) -0.81,35.375 12.725,35.375 12.95,35.15 12.95,14

## Silkscreen, mask and mechanical layers (free items; w line width, h text height)
Mechanical 1:
  the board outline again, w0.5